# EAGLE board PocketBeagle (EAGLE 9.6.2)
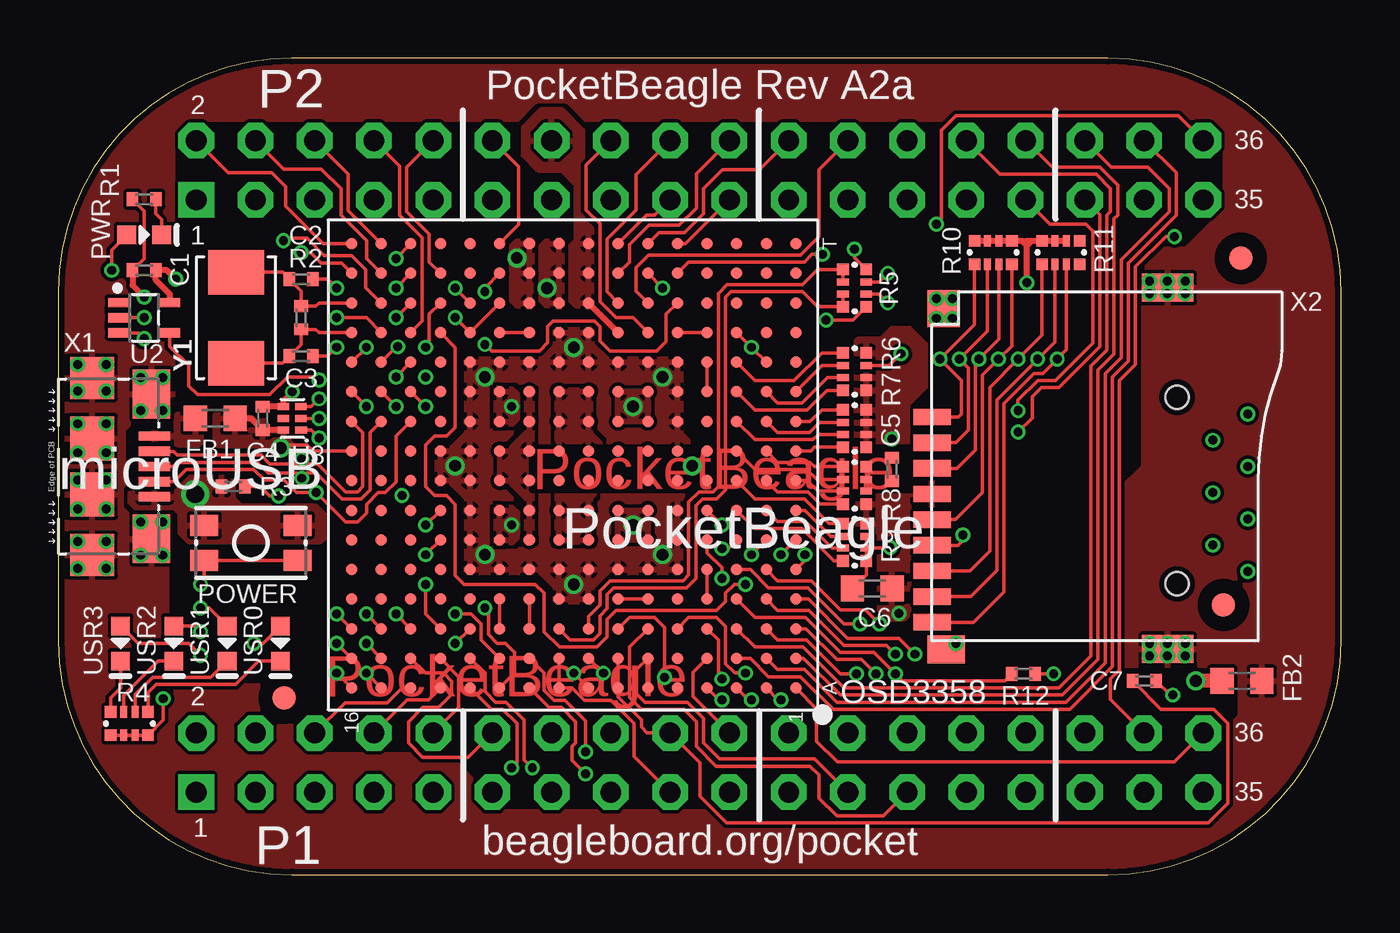
[diagram p0: board, top side]
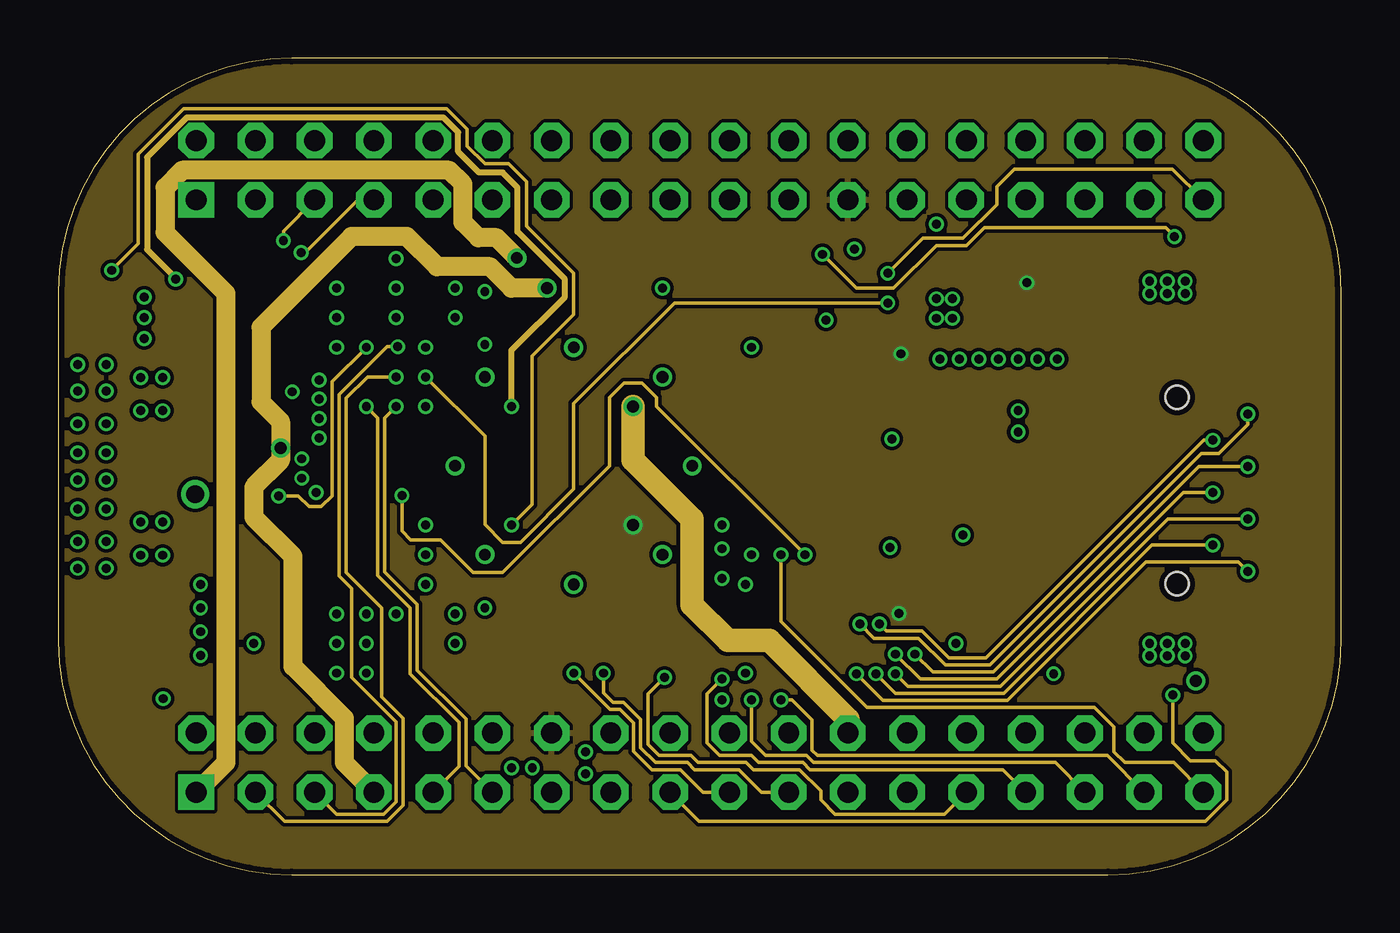
[diagram p1: board, inner layer VDD]
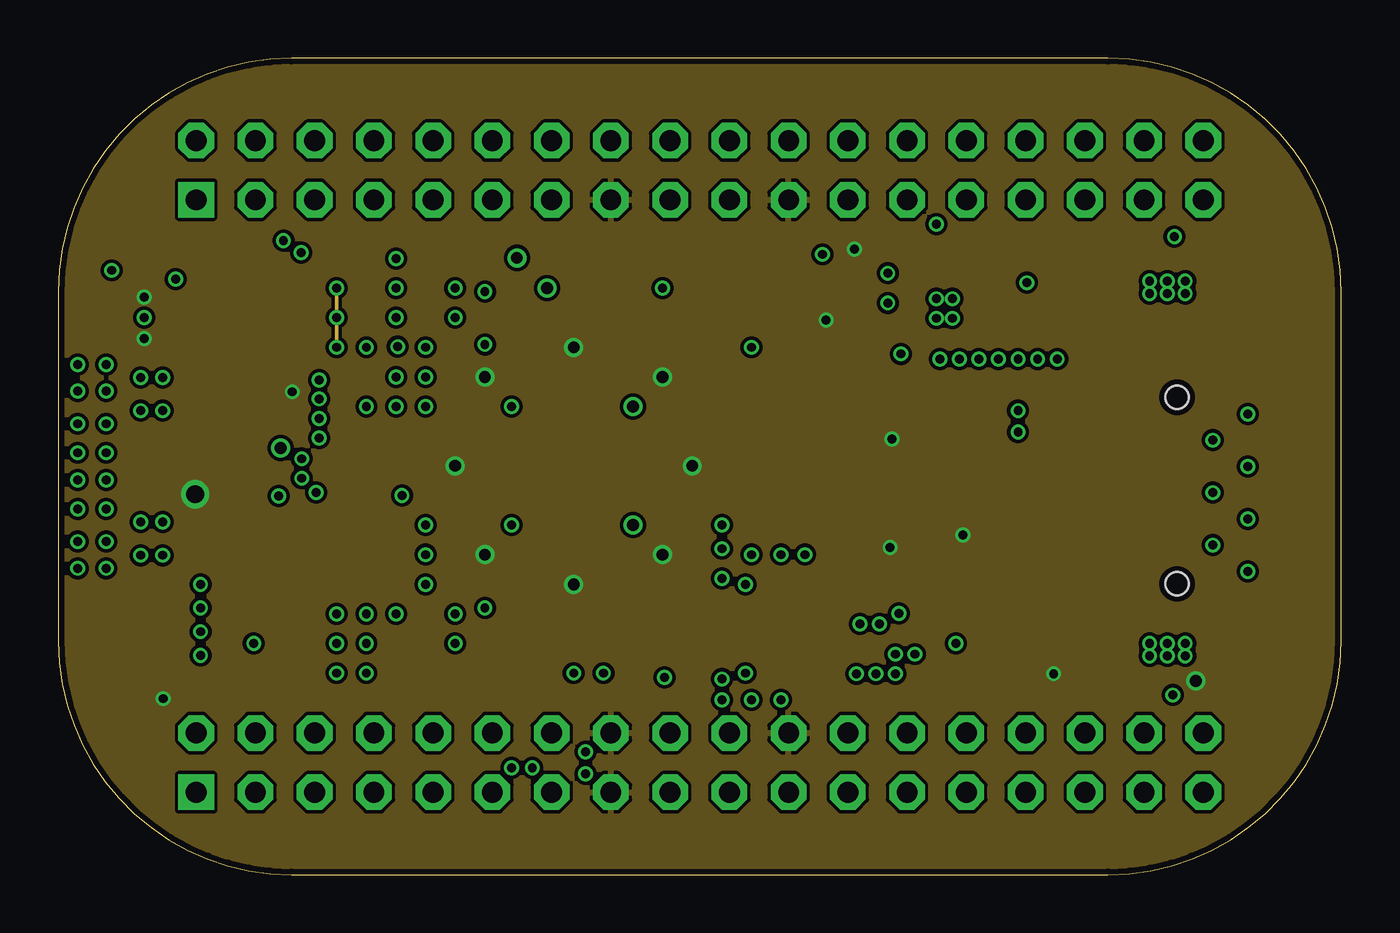
[diagram p2: board, inner layer DigitalGND]
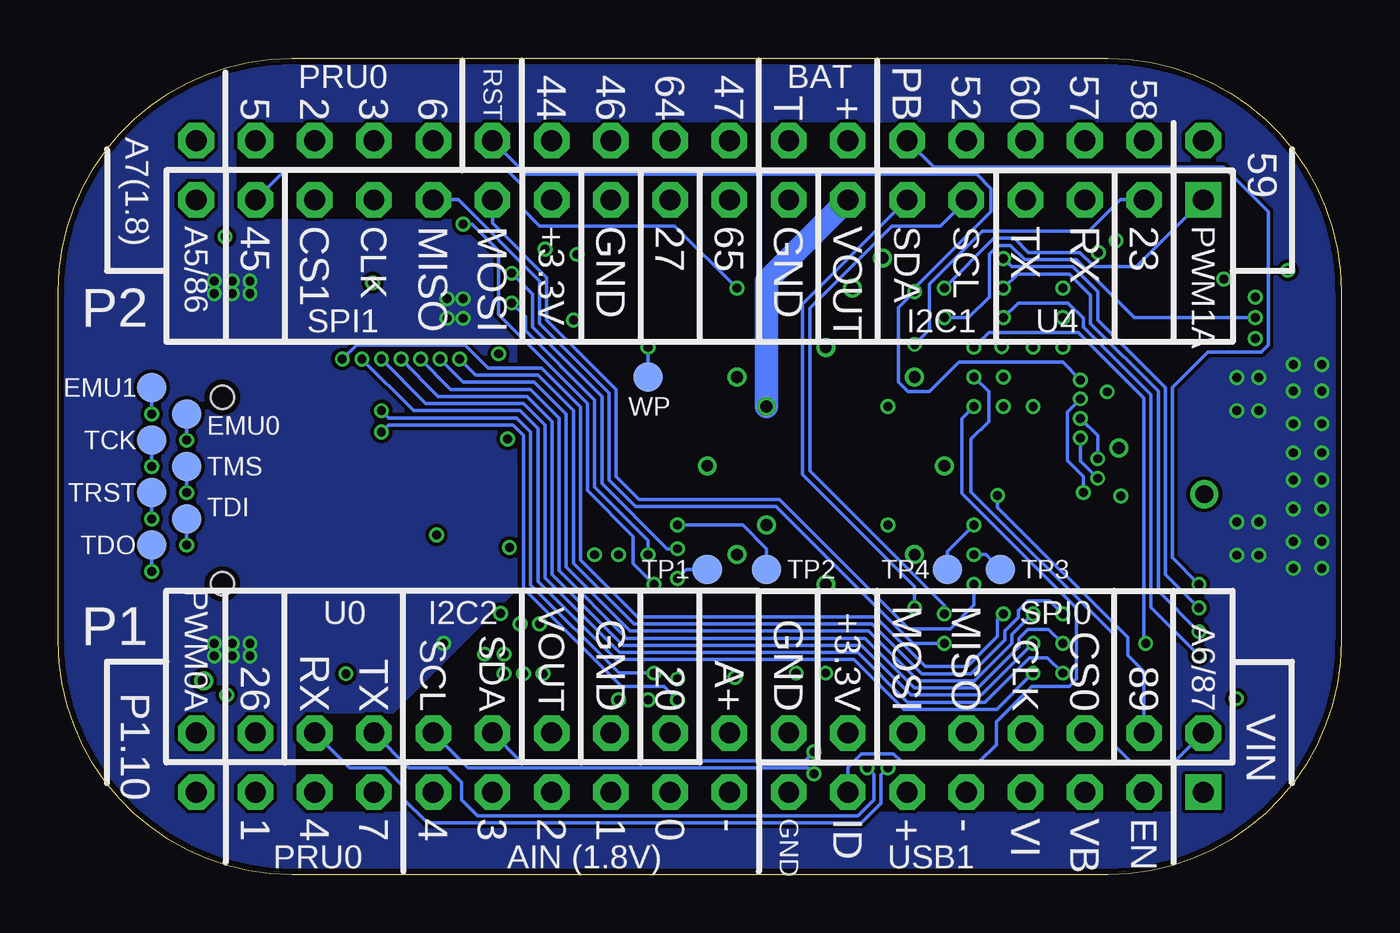
[diagram p3: board, bottom side, seen from below]

Size 55 x 35 mm. Coordinates in mm from the lower left corner, seen from the top.
Outline: 45,35 10,35 arc90 0,25 0,10 arc90 10,0 45,0 arc90 55,10 55,25 arc90 45,35
Copper layers (1+2+15+16): Top 0.035mm / dielectric 1.5mm / VDD 0.035mm / dielectric 0.15mm / DigitalGND 0.035mm / dielectric 0.2mm / Bottom 0.035mm
Design rules "default *": minimum track width 6mil, minimum drill 10mil, track to track 6mil, track to pad 6mil, pad to pad 6mil, via to via 6mil, smd to smd 6mil, copper to edge 10mil, drill to drill 8mil, minimum pad ring 10mil, minimum via ring 5mil, stop-mask expansion 4mil, vias tented up to drill 40mil, thermal gap 6mil
Milling: 8 lines

## Footprints (pad centres in the part's own frame; a part is rotated, then mirrored left to right if it is on the bottom)
0402 = smd 0.5 x 0.6: 1 -0.5,0; 2 0.5,0
0603 = smd 1 x 1.1: 1 -0.85,0; 2 0.85,0
B1,27 = smd 1.27 x 1.27: TP 0,0
FIDUCIAL_40MIL = smd 1.016 x 1.016: P$1 0,0
TH-2X18-(35MIL-DIA)-W/O-SILK = drill 0.889 pad 1.524 square: 1 -21.59,-1.27 | drill 0.889 pad 1.524 octagon: 2 -21.59,1.27; 3 -19.05,-1.27; 4 -19.05,1.27; 5 -16.51,-1.27; 6 -16.51,1.27; 7 -13.97,-1.27; 8 -13.97,1.27; 9 -11.43,-1.27; 10 -11.43,1.27; 11 -8.89,-1.27; 12 -8.89,1.27; 13 -6.35,-1.27; 14 -6.35,1.27; 15 -3.81,-1.27; 16 -3.81,1.27; 17 -1.27,-1.27; 18 -1.27,1.27; 19 1.27,-1.27; 20 1.27,1.27; 21 3.81,-1.27; 22 3.81,1.27; 23 6.35,-1.27; 24 6.35,1.27; 25 8.89,-1.27; 26 8.89,1.27; 27 11.43,-1.27; 28 11.43,1.27; 29 13.97,-1.27; 30 13.97,1.27; 31 16.51,-1.27; 32 16.51,1.27; 33 19.05,-1.27; 34 19.05,1.27; 35 21.59,-1.27; 36 21.59,1.27
MINI_PUSHBUTTON = smd 1.2 x 0.9: 1 -2,0.75; 2 2,0.75; 3 -2,-0.75; 4 2,-0.75
0603-LED = smd 0.8 x 0.8: A 0,0.75; K 0,-0.75
RN0804 = smd 0.498 x 0.5: 1 -0.801,-0.5; 4 0.801,-0.5; 5 0.801,0.5; 8 -0.801,0.5 | smd 0.3 x 0.5: 2 -0.25,-0.5; 3 0.25,-0.5; 6 0.25,0.5; 7 -0.25,0.5
OSD335X-BGA-256 = smd 0.5 x 0.5: A1 -9.525,-9.525; A2 -9.525,-8.255; A3 -9.525,-6.985; A4 -9.525,-5.715; A5 -9.525,-4.445; A6 -9.525,-3.175; A7 -9.525,-1.905; A8 -9.525,-0.635; A9 -9.525,0.635; A10 -9.525,1.905; A11 -9.525,3.175; A12 -9.525,4.445; A13 -9.525,5.715; A14 -9.525,6.985; A15 -9.525,8.255; A16 -9.525,9.525; B1 -8.255,-9.525; B2 -8.255,-8.255; B3 -8.255,-6.985; B4 -8.255,-5.715; B5 -8.255,-4.445; B6 -8.255,-3.175; B7 -8.255,-1.905; B8 -8.255,-0.635; B9 -8.255,0.635; B10 -8.255,1.905; B11 -8.255,3.175; B12 -8.255,4.445; B13 -8.255,5.715; B14 -8.255,6.985; B15 -8.255,8.255; B16 -8.255,9.525; C1 -6.985,-9.525; C2 -6.985,-8.255; C3 -6.985,-6.985; C4 -6.985,-5.715; C5 -6.985,-4.445; C6 -6.985,-3.175; C7 -6.985,-1.905; C8 -6.985,-0.635; C9 -6.985,0.635; C10 -6.985,1.905; C11 -6.985,3.175; C12 -6.985,4.445; C13 -6.985,5.715; C14 -6.985,6.985; C15 -6.985,8.255; C16 -6.985,9.525; D1 -5.715,-9.525; D2 -5.715,-8.255; D3 -5.715,-6.985; D4 -5.715,-5.715; D5 -5.715,-4.445; D6 -5.715,-3.175; D7 -5.715,-1.905; D8 -5.715,-0.635; D9 -5.715,0.635; D10 -5.715,1.905; D11 -5.715,3.175; D12 -5.715,4.445; D13 -5.715,5.715; D14 -5.715,6.985; D15 -5.715,8.255; D16 -5.715,9.525; E1 -4.445,-9.525; E2 -4.445,-8.255; E3 -4.445,-6.985; E4 -4.445,-5.715; E5 -4.445,-4.445; E6 -4.445,-3.175; E7 -4.445,-1.905; E8 -4.445,-0.635; E9 -4.445,0.635; E10 -4.445,1.905; E11 -4.445,3.175; E12 -4.445,4.445; E13 -4.445,5.715; E14 -4.445,6.985; E15 -4.445,8.255; E16 -4.445,9.525; F1 -3.175,-9.525; F2 -3.175,-8.255; F3 -3.175,-6.985; F4 -3.175,-5.715; F5 -3.175,-4.445; F6 -3.175,-3.175; F7 -3.175,-1.905; F8 -3.175,-0.635; F9 -3.175,0.635; F10 -3.175,1.905; F11 -3.175,3.175; F12 -3.175,4.445; F13 -3.175,5.715; F14 -3.175,6.985; F15 -3.175,8.255; F16 -3.175,9.525; G1 -1.905,-9.525; G2 -1.905,-8.255; G3 -1.905,-6.985; G4 -1.905,-5.715; G5 -1.905,-4.445; G6 -1.905,-3.175; G7 -1.905,-1.905; G8 -1.905,-0.635; G9 -1.905,0.635; G10 -1.905,1.905; G11 -1.905,3.175; G12 -1.905,4.445; G13 -1.905,5.715; G14 -1.905,6.985; G15 -1.905,8.255; G16 -1.905,9.525; H1 -0.635,-9.525; H2 -0.635,-8.255; H3 -0.635,-6.985; H4 -0.635,-5.715; H5 -0.635,-4.445; H6 -0.635,-3.175; H7 -0.635,-1.905; H8 -0.635,-0.635; H9 -0.635,0.635; H10 -0.635,1.905; H11 -0.635,3.175; H12 -0.635,4.445; H13 -0.635,5.715; H14 -0.635,6.985; H15 -0.635,8.255; H16 -0.635,9.525; J1 0.635,-9.525; J2 0.635,-8.255; J3 0.635,-6.985; J4 0.635,-5.715; J5 0.635,-4.445; J6 0.635,-3.175; J7 0.635,-1.905; J8 0.635,-0.635; J9 0.635,0.635; J10 0.635,1.905; J11 0.635,3.175; J12 0.635,4.445; J13 0.635,5.715; J14 0.635,6.985; J15 0.635,8.255; J16 0.635,9.525; K1 1.905,-9.525; K2 1.905,-8.255; K3 1.905,-6.985; K4 1.905,-5.715; K5 1.905,-4.445; K6 1.905,-3.175; K7 1.905,-1.905; K8 1.905,-0.635; K9 1.905,0.635; K10 1.905,1.905; K11 1.905,3.175; K12 1.905,4.445; K13 1.905,5.715; K14 1.905,6.985; K15 1.905,8.255; K16 1.905,9.525; L1 3.175,-9.525; L2 3.175,-8.255; L3 3.175,-6.985; L4 3.175,-5.715; L5 3.175,-4.445; L6 3.175,-3.175; L7 3.175,-1.905; L8 3.175,-0.635; L9 3.175,0.635; L10 3.175,1.905; L11 3.175,3.175; L12 3.175,4.445; L13 3.175,5.715; L14 3.175,6.985; L15 3.175,8.255; L16 3.175,9.525; M1 4.445,-9.525; M2 4.445,-8.255; M3 4.445,-6.985; M4 4.445,-5.715; M5 4.445,-4.445; M6 4.445,-3.175; M7 4.445,-1.905; M8 4.445,-0.635; M9 4.445,0.635; M10 4.445,1.905; M11 4.445,3.175; M12 4.445,4.445; M13 4.445,5.715; M14 4.445,6.985; M15 4.445,8.255; M16 4.445,9.525; N1 5.715,-9.525; N2 5.715,-8.255; N3 5.715,-6.985; N4 5.715,-5.715; N5 5.715,-4.445; N6 5.715,-3.175; N7 5.715,-1.905; N8 5.715,-0.635; N9 5.715,0.635; N10 5.715,1.905; N11 5.715,3.175; N12 5.715,4.445; N13 5.715,5.715; N14 5.715,6.985; N15 5.715,8.255; N16 5.715,9.525; P1 6.985,-9.525; P2 6.985,-8.255; P3 6.985,-6.985; P4 6.985,-5.715; P5 6.985,-4.445; P6 6.985,-3.175; P7 6.985,-1.905; P8 6.985,-0.635; P9 6.985,0.635; P10 6.985,1.905; P11 6.985,3.175; P12 6.985,4.445; P13 6.985,5.715; P14 6.985,6.985; P15 6.985,8.255; P16 6.985,9.525; R1 8.255,-9.525; R2 8.255,-8.255; R3 8.255,-6.985; R4 8.255,-5.715; R5 8.255,-4.445; R6 8.255,-3.175; R7 8.255,-1.905; R8 8.255,-0.635; R9 8.255,0.635; R10 8.255,1.905; R11 8.255,3.175; R12 8.255,4.445; R13 8.255,5.715; R14 8.255,6.985; R15 8.255,8.255; R16 8.255,9.525; T1 9.525,-9.525; T2 9.525,-8.255; T3 9.525,-6.985; T4 9.525,-5.715; T5 9.525,-4.445; T6 9.525,-3.175; T7 9.525,-1.905; T8 9.525,-0.635; T9 9.525,0.635; T10 9.525,1.905; T11 9.525,3.175; T12 9.525,4.445; T13 9.525,5.715; T14 9.525,6.985; T15 9.525,8.255; T16 9.525,9.525
SC70(TI-DCK) = smd 0.4 x 0.9: 1 0.65,1.1; 2 0,1.1; 3 -0.65,1.1; 4 -0.65,-1.1; 5 0.65,-1.1
SON-6(TI)-DRY = smd 0.3 x 0.52: 1 -0.5,-0.38 | smd 0.3 x 0.49: 2 0,-0.375; 3 0.5,-0.375; 4 0.5,0.375; 5 0,0.375; 6 -0.5,0.375
10118192-0001LF(MICRO-USB-B-AMPHENOL-FCI) = smd 1.8 x 1.9: CGND1 -3.8,0; CGND4 3.8,0 | smd 1.9 x 1.9: CGND2 -1.2,0; CGND3 1.2,0 | smd 2.1 x 1.6: CGND5 3.1,2.55; CGND6 -3.1,2.55 | smd 0.4 x 1.35: D+ 0,2.675; D- -0.65,2.675; GND 1.3,2.675; ID 0.65,2.675; VBUS -1.3,2.675
MICROSD = smd 1.6 x 0.7: 1 0,4.4; 2 0,3.3; 3 0,2.2; 4 0,1.1; 5 0,0; 6 0,-1.1; 7 0,-2.2; 8 0,-3.3; 9 0,-4.4 | smd 1.6 x 1.2: G1 0.6,-5.56 | smd 2.2 x 1.2: G2 10.1,-5.55; G3 10.1,9.95 | smd 1.4 x 1.6: G4 0.5,9.05 | hole 1: 10.5,-2.75; 10.5,5.25
CRYSTAL_5X3.2MM = smd 1.9 x 2.4: 1 -1.95,0; 2 1.95,0

## Placement (x,y rotation side)
C1  0.1uF, 6.3V  [0402]  3.68,25.91 180 top
C2  18pF, 50V  [0402]  10.41,25.53 180 top
C3  18pF, 50V  [0402]  10.41,22.23 180 top
C4  .1uF, 6.3V  [0402]  8.76,19.56 90 top
C5  0.1uF, 6.3V  [0402]  35.74,17.37 90 top
C6  10uF, 10V  [0603]  34.9,12.27 180 top
C7  0.1uF, 6.3V  [0402]  46.56,8.31 0 top
EMU0  PTR1B1,27  [B1,27]  49.5,19.75 270 bottom
EMU1  PTR1B1,27  [B1,27]  51,20.88 270 bottom
FB1  [0603]  6.73,19.56 0 top
FB2  [0603]  50.75,8.31 180 top
FUD1  FIDUCIAL  [FIDUCIAL_40MIL]  50.7,26.42 0 top
FUD2  FIDUCIAL  [FIDUCIAL_40MIL]  9.69,7.58 270 top
FUD3  FIDUCIAL  [FIDUCIAL_40MIL]  49.95,11.57 0 top
P1  [TH-2X18-(35MIL-DIA)-W/O-SILK]  27.5,4.8 0 top
P2  [TH-2X18-(35MIL-DIA)-W/O-SILK]  27.5,30.2 0 top
POWER  MINI_PUSHBUTTON  [MINI_PUSHBUTTON]  8.26,14.22 0 top
PWR  LTST-C191TBKT  [0603-LED]  3.68,27.43 90 top
R1  1k  [0402]  3.68,28.96 0 top
R2  1M, 1%  [0402]  10.41,23.88 90 top
R3  10k  [0402]  7.49,16.64 0 top
R4  1k  [RN0804]  3.05,6.48 180 top
R5  10k  [RN0804]  34.14,25.15 270 top
R6  100k  [RN0804]  34.14,21.56 270 top
R7  100k  [RN0804]  34.14,19.13 270 top
R8  100k  [RN0804]  34.14,16.69 270 top
R9  100k  [RN0804]  34.14,14.25 90 top
R10  10k  [RN0804]  40.08,26.67 0 top
R11  10k  [RN0804]  42.98,26.67 180 top
R12  10k  [0402]  41.38,8.61 180 top
TCK  PTR1B1,27  [B1,27]  51,18.62 270 bottom
TDI  PTR1B1,27  [B1,27]  49.5,15.25 270 bottom
TDO  PTR1B1,27  [B1,27]  51,14.12 270 bottom
TMS  PTR1B1,27  [B1,27]  49.5,17.5 270 bottom
TP1  PTR1B1,27  [B1,27]  27.18,13.08 0 bottom
TP2  PTR1B1,27  [B1,27]  24.64,13.08 0 bottom
TP3  PTR1B1,27  [B1,27]  14.61,13.08 0 bottom
TP4  PTR1B1,27  [B1,27]  16.89,13.08 0 bottom
TRST  PTR1B1,27  [B1,27]  51,16.38 270 bottom
U1  OSD3358-512M-BSM  [OSD335X-BGA-256]  22.1,17.53 90 top
U2  SN74LVC1G07DCK  [SC70(TI-DCK)]  3.68,23.88 90 top
U3  TPD4S012DRY  [SON-6(TI)-DRY]  10.03,19.56 90 top
USR0  LTST-C191TBKT  [0603-LED]  9.53,9.91 0 top
USR1  LTST-C191TBKT  [0603-LED]  7.24,9.91 0 top
USR2  LTST-C191TBKT  [0603-LED]  4.95,9.91 0 top
USR3  LTST-C191TBKT  [0603-LED]  2.67,9.91 0 top
WP  PTR1B1,27  [B1,27]  29.72,21.34 0 bottom
X1  10118192-0001LF  [10118192-0001LF(MICRO-USB-B-AMPHENOL-FCI)]  1.45,17.5 270 top
X2  MICROSD  [MICROSD]  37.46,15.22 0 top
Y1  24 MHz  [CRYSTAL_5X3.2MM]  7.62,23.88 90 top

## Library data of the parts
C1-C7 FB1 FB2 PWR R1-R12 USR0 USR1-USR3 = GHI-BasicComponents
EMU0 EMU1 TCK TDI TDO TMS TP1-TP4 TRST WP = testpad
FUD1-FUD3 = GHI
P1 P2 = GHI-Headers
POWER Y1 = GHI2
U1 = GHI-SoMs-Processors
U2 U3 = GHI-IC
X1 = GHI-Connectors
X2 = microSD

## Nets
3.3V: C5.1 C6.1 P1.14 P2.23 R6.7 R8.5 R9.4 R10.5 R10.6 R10.7 R10.8 R11.2 R11.3 R11.4 U1.F6 U1.F7 U1.G6 U1.G7 X2.4
(U1.A15)MMC0.D1: R11.6 U1.A15 X2.8
(U1.A16)MMC0.D0: R11.5 U1.A16 X2.7
(U1.B15)MMC0.CLK: R10.4 U1.B15 X2.5
(U1.B16)MMC0.CMD: R10.3 U1.B16 X2.3
(U1.C8)AIN5~1.8V: R5.1 R5.2 U1.C8
(U1.C9)AIN6~1.8V: R5.3 R5.4 U1.C9
(U1.C14)MMC0.CD: R11.7 U1.C14 X2.9
(U1.C15)MMC0.D3: R10.2 U1.C15 X2.2
(U1.C16)MMC0.D2: R10.1 U1.C16 X2.1
(U1.G1)LCD.D2.B5: R9.6 U1.G1
(U1.G2)LCD.D1.B4: R9.7 U1.G2
(U1.G3)LCD.D0.B3: R9.8 U1.G3
(U1.H1)LCD.D5.G2: R8.3 U1.H1
(U1.H2)LCD.D4.B7: R8.4 U1.H2
(U1.H3)LCD.D3.B6: R9.5 U1.H3
(U1.J1)LCD.D8.G5: R7.4 U1.J1
(U1.J2)LCD.D7.G4: R8.1 U1.J2
(U1.J3)LCD.D6.G3: R8.2 U1.J3
(U1.K1)LCD.D11.R3: R7.1 U1.K1
(U1.K2)LCD.D10.G7: R7.2 U1.K2
(U1.K3)LCD.D9.G6: R7.3 U1.K3
(U1.K14)USBC.ID: U1.K14 U3.3 X1.ID
(U1.K15)USBC.D+: U1.K15 U3.1 X1.D+
(U1.K16)USBC.D-: U1.K16 U3.2 X1.D-
(U1.L1)LCD.D14.R6: R6.2 U1.L1
(U1.L2)LCD.D13.R5: R6.3 U1.L2
(U1.L3)LCD.D12.R4: R6.4 U1.L3
(U1.M2)EEPROM.WP: U1.M2 U1.N3 WP.TP
(U1.M3)LCD.D15.R7: R6.1 U1.M3
(U1.P13)USR0: U1.P13 USR0.A
(U1.P14)USR3: U1.P14 USR3.A
(U1.R14)USR2: U1.R14 USR2.A
(U1.T14)USR1: U1.T14 USR1.A
AIN0(1.8V): P1.19 U1.A8
AIN1(1.8V): P1.21 U1.B8
AIN2(1.8V): P1.23 U1.B6
AIN3(1.8V): P1.25 U1.C6
AIN4(1.8V): P1.27 U1.C7
AIN5(3.3V): P2.35 R5.7 U1.F3
AIN6/GPIO87: P1.2 R5.6 U1.F2
AIN7(1.8V): P2.36 U1.N13
AIN.VREF+: C7.1 P1.18 U1.A7 U1.B7
AIN.VREF-: C7.2 P1.17 U1.A9 U1.B9
BAT.TEMP: P2.16 U1.N6
BAT.VIN: P2.14 U1.N7 U1.P8 U1.R8 U1.T8
CGND: FB2.1 X1.CGND1 X1.CGND2 X1.CGND3 X1.CGND4 X1.CGND5 X1.CGND6 X2.G1 X2.G2 X2.G3 X2.G4
GND [power]: C1.2 C4.2 C5.2 C6.2 FB2.2 P1.15 P1.16 P1.22 P2.15 P2.21 POWER.1 POWER.2 R1.1 R3.1 R4.5 R4.6 R4.7 R4.8 R5.5 R5.8 R6.5 R6.6 R6.8 R7.5 R7.6 R7.7 R7.8 R8.6 R8.7 R8.8 R9.1 R9.2 R9.3 R12.1 U1.D8 U1.D9 U1.E5 U1.E6 U1.E7 U1.E8 U1.E9 U1.E10 U1.E11 U1.E12 U1.F5 U1.F12 U1.G5 U1.G12 U1.H4 U1.H5 U1.H12 U1.H13 U1.J4 U1.J5 U1.J12 U1.J13 U1.K5 U1.K12 U1.L5 U1.L12 U1.M5 U1.M6 U1.M7 U1.M8 U1.M9 U1.M10 U1.M11 U1.M12 U1.N8 U1.N9 U2.3 U3.4 X1.GND X2.6
GPIO20: P1.20 U1.B4
GPIO23: P2.3 U1.P5
GPIO26: P1.34 U1.R5
GPIO27: P2.19 U1.T5
GPIO44: P2.24 U1.P6
GPIO45: P2.33 U1.R6
GPIO46: P2.22 U1.T6
GPIO47: P2.18 U1.P7
GPIO52: P2.10 U1.R13
GPIO57: P2.6 U1.T15
GPIO58: P2.4 U1.R15
GPIO59: P2.2 U1.T16
GPIO60: P2.8 U1.N14
GPIO64: P2.20 U1.R7
GPIO65: P2.17 U1.T7
GPIO89: P1.4 U1.E1
I2C1.SCL: P2.9 U1.B11
I2C1.SDA: P2.11 U1.A11
I2C2.SCL: P1.28 U1.A10
I2C2.SDA: P1.26 U1.B10
JTAG_EMU0: EMU0.TP U1.E2
JTAG_EMU1: EMU1.TP U1.E3
JTAG_TCK: TCK.TP U1.D1
JTAG_TDI: TDI.TP U1.C1
JTAG_TDO: TDO.TP U1.C2
JTAG_TMS: TMS.TP U1.D2
JTAG_TRST#: R12.2 TRST.TP U1.D3
N$1: R4.3 USR2.K
N$2: R4.4 USR3.K
N$4: PWR.K R1.2
N$5: R4.2 USR1.K
N$6: R4.1 USR0.K
N$7: TP1.TP U1.F4
N$9: TP2.TP U1.G4
N$10: TP3.TP U1.F13
N$11: TP4.TP U1.G13
N$12: U1.D6 U1.D7
N$22: R3.2 U1.M16
N$24: U1.N4 U1.N5
N$25: U1.L4 U1.M4
N$26: U1.D4 U1.E4
N$27: U1.N10 U1.N11
N$31: U1.C11 U1.D11
N$32: U1.C10 U1.D10
OSC.GND: C2.1 C3.1 U1.N15
OSC.IN: C2.2 R2.2 U1.P16 Y1.2
OSC.OUT: C3.2 R2.1 U1.N16 Y1.1
PMIC_PGOOD: U1.N12 U1.P11 U2.2
PRU0.1: P1.33 U1.A2
PRU0.2: P2.32 U1.B2
PRU0.3: P2.30 U1.B1
PRU0.4: P1.31 U1.A3
PRU0.5: P2.34 U1.B3
PRU0.6: P2.28 U1.C3
PRU0.7: P1.29 U1.C4
PRU1.10: P1.35 U1.F1
PWM0A: P1.36 U1.A1
PWM1A: P2.1 U1.P12
PWR.BTN: P2.12 POWER.3 POWER.4 U1.T11
RESET#: P2.26 U1.R11 U2.4
SPI0.CLK: P1.8 U1.A13
SPI0.CS: P1.6 U1.A14
SPI0.MISO: P1.10 U1.B13
SPI0.MOSI: P1.12 U1.B14
SPI1.CLK: P2.29 U1.C5
SPI1.CS: P2.31 U1.A4
SPI1.MISO: P2.27 U1.C12
SPI1.MOSI: P2.25 U1.C13
UART0.RX: P1.32 U1.A12
UART0.TX: P1.30 U1.B12
UART4.RX: P2.5 U1.P15
UART4.TX: P2.7 U1.R16
USB1.D+: P1.11 U1.L15
USB1.D-: P1.9 U1.L16
USB1.DRVVBUS: P1.3 U1.M14
USB1.ID: P1.13 U1.L14
USB1.VBUS: P1.5 U1.M15
VBUS.RAW: FB1.1 X1.VBUS
VDD_1V8: U1.F10 U1.G10 U1.H10 U1.H11 U1.J10 U1.J11 U1.K10 U1.L10
VDD_3V3A: U1.F8 U1.F9 U1.G8 U1.G9 U1.H7 U1.H8 U1.H9 U1.J7 U1.J8 U1.J9 U1.K8 U1.K9 U1.L8 U1.L9
VDD_3V3AUX: PWR.A U1.F11 U1.G11
VDD_RTC: C1.1 U1.K11 U1.L11 U2.5
VIN: P1.1 U1.P10 U1.R10 U1.T10
VIN.USB: C4.1 FB1.2 P1.7 U1.J16 U1.P9 U1.R9 U1.T9 U3.6
VOUT: P1.24 P2.13 U1.K6 U1.K7 U1.L6 U1.L7

## Tracks (layer width: path | path; a pad name or v marks a point on that pad's centre or on a via)
3.3V  (via drill 0.38, 0.51)
  Top 0.152: v36.12,22.33 35.61,21.82 R6.7
  Top 0.254: R11.2 R11.3 R11.4 41.72,27.17 | R10.8 R10.7 R10.6 R10.5 41.33,27.17 | v41.53,25.38 41.53,26.98 | 41.53,26.98 41.33,27.17 | 41.72,27.17 41.53,26.98 | 41.33,27.17 41.56,27.17 41.6,27.13 | 41.72,27.17 41.5,27.17 41.45,27.13
  other vias: 24.64,14.99 36.04,11.2
  pour VDD: -0.75,35.75 55.75,35.75 55.75,-0.75 -0.75,-0.75
  pour Top: 24,14.35 24,15.62 25.27,15.62 25.27,14.35
  pour Top: 35.59,10.97 36.27,10.97 36.5,11.2 36.5,15.62 36.65,15.77 37.64,15.77 37.64,16.84 35.36,16.84 34.98,16.46 34.44,16.46 34.29,16.31 34.29,14.94 34.37,14.86 34.98,14.86 35.2,14.63 35.2,11.35
(U1.A15)MMC0.D1  (via drill 0.38)
  Top 0.152: U1.A15 v13.21,8.64 | X2.8 39.12,11.92 40.23,13.03 40.23,20.34 v41.99,22.1 42.73,22.84 R11.6
  Bottom 0.152: v13.21,8.64 14.76,7.09 18.75,7.09 20.88,9.22 31.09,9.22 34.44,12.57 34.44,19.13 35.2,19.89 39.78,19.89 v41.99,22.1
(U1.A16)MMC0.D0  (via drill 0.38)
  Top 0.152: U1.A16 v11.94,8.64 | X2.7 39.08,13.02 39.93,13.87 39.93,20.88 v41.15,22.1 42.18,23.13 R11.5
  Bottom 0.152: v11.94,8.64 12.6,9.3 13.36,9.3 15.27,7.39 18.59,7.39 20.73,9.53 30.94,9.53 34.14,12.72 34.14,19.28 35.05,20.19 39.24,20.19 v41.15,22.1
(U1.B15)MMC0.CLK  (via drill 0.38)
  Top 0.152: U1.B15 v13.21,9.91 | X2.5 38.46,15.22 39.62,16.38 39.62,21.41 v40.31,22.1 40.88,22.67 R10.4
  Bottom 0.152: v13.21,9.91 15.42,7.7 18.44,7.7 20.57,9.83 30.79,9.83 33.83,12.88 33.83,19.43 34.9,20.5 38.71,20.5 v40.31,22.1
(U1.B16)MMC0.CMD  (via drill 0.38)
  Top 0.152: U1.B16 v11.94,9.91 | X2.3 38.52,17.42 39.32,18.21 39.32,21.95 v39.47,22.1 40.33,22.96 R10.3
  Bottom 0.152: v11.94,9.91 12.55,10.52 13.44,10.52 13.82,10.13 13.82,9.75 15.57,8 18.29,8 20.42,10.13 30.63,10.13 33.53,13.03 33.53,19.58 34.75,20.8 38.18,20.8 v39.47,22.1
(U1.C8)AIN5~1.8V
  Top 0.152: U1.C8 22.73,11.07 23.22,11.56 23.22,12.17 23.65,12.6 26.77,12.6 27.03,12.85 27.03,15.98 27.46,16.41 28.07,16.41 28.3,16.64 28.3,24.92 28.68,25.3 31.9,25.3 32.55,25.95 R5.1 R5.2
(U1.C9)AIN6~1.8V
  Top 0.152: U1.C9 21.95,10.06 22.94,10.06 23.22,10.34 23.22,11.1 23.52,11.4 23.52,12.01 23.8,12.29 26.92,12.29 27.33,12.7 27.33,15.82 27.61,16.1 28.22,16.1 28.6,16.48 28.6,24.77 28.83,24.99 31.9,24.99 32.55,24.34 R5.4 R5.3
(U1.C14)MMC0.CD  (via drill 0.38)
  Top 0.152: U1.C14 v14.48,11.18 | X2.9 39.24,10.82 40.54,12.12 40.54,20.19 41.83,21.49 42.22,21.49 v42.82,22.1 43.23,22.5 R11.7
  Bottom 0.152: v14.48,11.18 14.73,10.92 14.73,10.21 16.03,8.91 17.83,8.91 19.96,11.05 30.18,11.05 32.61,13.49 32.61,20.04 34.29,21.72 36.58,21.72 37.57,22.71 42.22,22.71 v42.82,22.1
(U1.C15)MMC0.D3  (via drill 0.38)
  Top 0.152: U1.C15 v13.21,11.18 | X2.2 38.48,18.52 39.01,19.05 39.01,21.72 v38.63,22.1 39.83,23.3 R10.2
  Bottom 0.152: v13.21,11.18 13.23,11.18 14.12,10.29 14.12,9.91 15.72,8.31 18.14,8.31 20.27,10.44 30.48,10.44 33.22,13.18 33.22,19.74 34.59,21.11 37.64,21.11 v38.63,22.1
(U1.C16)MMC0.D2  (via drill 0.38)
  Top 0.152: U1.C16 v11.94,11.18 | X2.1 38.59,19.62 38.71,19.74 38.71,21.18 v37.8,22.1 39.28,23.58 R10.1
  Bottom 0.152: v11.94,11.18 12.5,11.73 13.44,11.73 13.84,11.33 13.84,11.02 14.43,10.44 14.43,10.06 15.88,8.61 17.98,8.61 20.12,10.74 30.33,10.74 32.92,13.34 32.92,19.89 34.44,21.41 37.11,21.41 v37.8,22.1
(U1.G1)LCD.D2.B5
  Top 0.152: R9.6 33.13,14.5 32,15.62 U1.G1
(U1.G2)LCD.D1.B4
  Top 0.152: U1.G2 30.84,15.14 32.03,15.14 33.17,14 R9.7
(U1.G3)LCD.D0.B3
  Top 0.152: U1.G3 29.87,14.83 31.88,14.83 33.26,13.45 R9.8
(U1.H1)LCD.D5.G2
  Top 0.152: R8.3 32.56,16.44 32.11,16.89 U1.H1
(U1.H2)LCD.D4.B7
  Top 0.152: U1.H2 30.84,16.41 32.13,16.41 32.65,15.89 R8.4
(U1.H3)LCD.D3.B6
  Top 0.152: U1.H3 29.87,16.1 31.98,16.1 33.03,15.05 R9.5
(U1.J1)LCD.D8.G5
  Top 0.152: U1.J1 32.26,18.16 32.42,18.32 R7.4
(U1.J2)LCD.D7.G4
  Top 0.152: U1.J2 30.84,17.68 32.23,17.68 32.42,17.49 R8.1
(U1.J3)LCD.D6.G3
  Top 0.152: U1.J3 29.87,17.37 32.08,17.37 32.52,16.94 R8.2
(U1.K1)LCD.D11.R3
  Top 0.152: R7.1 32.73,19.93 32.23,19.43 U1.K1
(U1.K2)LCD.D10.G7
  Top 0.152: U1.K2 30.84,18.95 32.21,18.95 32.63,19.38 R7.2
(U1.K3)LCD.D9.G6
  Top 0.152: U1.K3 29.87,18.64 32.36,18.64 32.59,18.88 R7.3
(U1.K14)USBC.ID  (via drill 0.38)
  Top 0.152: X1.ID 4.96,16.85 5.49,17.37 8.38,17.37 8.84,16.92 9.68,16.92 10.21,16.38 v11.05,16.38 12.32,15.11 12.83,15.11 13.21,15.49 13.21,15.88 13.72,16.38 14.02,16.38 14.48,16.84 14.48,18.8 U1.K14 | U3.3 10.84,20.06 v11.18,20.4
  Bottom 0.152: v11.18,20.4 11.73,19.84 11.73,17.75 11.05,17.07 v11.05,16.38
(U1.K15)USBC.D+  (via drill 0.38)
  Top 0.152: U1.K15 13.36,18.95 13.36,16.48 12.98,16.1 12.17,16.1 11.05,17.22 10.67,17.22 v10.44,16.99 10.21,17.22 8.99,17.22 8.53,17.68 5.11,17.68 4.93,17.5 X1.D+ | U3.1 10.84,19.06 v11.18,18.72
  Bottom 0.152: v11.18,18.72 11.18,17.73 v10.44,16.99
(U1.K16)USBC.D-  (via drill 0.38)
  Top 0.152: U1.K16 13.06,18.95 13.06,16.64 12.83,16.41 12.32,16.41 11.12,17.6 10.67,17.6 v10.44,17.83 10.21,17.6 9.07,17.6 8.69,17.98 5.11,17.98 4.94,18.15 X1.D- | U3.2 v11.18,19.56
  Bottom 0.152: v11.18,19.56 10.44,18.82 v10.44,17.83
(U1.L1)LCD.D14.R6
  Top 0.152: U1.L1 32.74,21.82 R6.2
(U1.L2)LCD.D13.R5
  Top 0.152: U1.L2 30.84,20.22 31.88,20.22 32.97,21.32 R6.3
(U1.L3)LCD.D12.R4
  Top 0.152: U1.L3 29.87,19.91 32.11,19.91 32.96,20.76 R6.4
(U1.M2)EEPROM.WP  (via drill 0.38)
  Top 0.152: U1.N3 v29.72,22.61 U1.M2
  Bottom 0.152: v29.72,22.61 WP.TP
(U1.M3)LCD.D15.R7
  Top 0.152: U1.M3 29.87,21.18 31.55,21.18 32.73,22.37 R6.1
(U1.P13)USR0  (via drill 0.38)
  Top 0.152: v8.38,9.91 8.78,9.91 USR0.A | U1.P13 15.9,24.03 15.9,22.76 v15.75,22.61
  Bottom 0.152: v15.75,22.61 15.11,23.24 11.28,23.24 8.46,20.42 8.46,9.98 v8.38,9.91
(U1.P14)USR3  (via drill 0.38)
  Top 0.152: U1.P14 v14.48,23.88 | USR3.A 3.42,9.91 5.59,9.91 v6.1,9.4
  Bottom 0.152: v14.48,23.88 13.84,24.51 11.71,24.51 11.05,23.85 11.05,23.47 8.15,20.57 8.15,11.46 v6.1,9.4
(U1.R14)USR2  (via drill 0.38)
  Top 0.152: v14.48,25.15 U1.R14 | USR2.A 5.85,10.66 v6.1,10.41
  Bottom 0.152: v14.48,25.15 13.87,25.76 11.66,25.76 10.74,24.84 10.74,23.62 7.85,20.73 7.85,12.17 v6.1,10.41
(U1.T14)USR1  (via drill 0.38)
  Top 0.152: v14.48,26.42 U1.T14 | USR1.A 6.46,11.43 v6.1,11.43
  Bottom 0.152: v14.48,26.42 14.12,26.06 11.51,26.06 10.44,24.99 10.44,23.77 7.54,20.88 7.54,12.88 v6.1,11.43
AIN0(1.8V)  (via drill 0.38)
  Top 0.152: U1.A8 v22.1,8.64
  VDD 0.152: v22.1,8.64 23.65,7.09 24.08,7.09 24.66,6.5 24.66,5.28 25.45,4.5 26.67,4.5 27.64,3.53 P1.19
AIN1(1.8V)  (via drill 0.38)
  Top 0.152: U1.B8 v23.37,8.64
  VDD 0.152: v23.37,8.64 23.37,7.8 23.77,7.39 24.23,7.39 24.97,6.66 24.97,5.44 25.6,4.8 26.98,4.8 27.28,4.5 29.18,4.5 30.15,3.53 P1.21
AIN2(1.8V)
  Top 0.152: U1.B6 24.79,8.79 24.79,7.75 25.15,7.39 26.98,7.39 27.66,6.71 27.66,5.64 28.35,4.95 32.43,4.95 P1.23
AIN3(1.8V)
  Top 0.152: P1.25 35.38,2.52 33.38,2.52 32.61,3.28 32.61,4.27 32.23,4.65 28.19,4.65 27.36,5.49 27.36,6.55 26.82,7.09 24.99,7.09 24.49,7.59 24.49,9.75 U1.C6
AIN4(1.8V)  (via drill 0.38)
  Top 0.152: U1.C7 24.49,11.02 25.55,11.02 25.98,10.59 v25.98,8.46
  VDD 0.152: v25.98,8.46 25.27,7.75 25.27,5.59 25.76,5.11 27.13,5.11 27.43,4.8 29.49,4.8 29.79,4.5 31.77,4.5 32.69,3.58 32.69,3.2 33.3,2.59 37.99,2.59 P1.27
AIN5(3.3V)  (via drill 0.38)
  Top 0.152: U1.F3 28.7,13.97 v28.45,13.97 | R5.7 35.17,25.4 v35.56,25.78
  VDD 0.152: v35.56,25.78 37.06,27.28 38.79,27.28 40.23,28.73 40.23,29.49 41,30.25 47.77,30.25 P2.35
  Bottom 0.152: v28.45,13.97 28.91,13.97 31.7,16.76 31.7,20.5 34.67,23.47 34.67,24.89 v35.56,25.78
AIN6/GPIO87  (via drill 0.38)
  Top 0.152: U1.F2 v29.72,13.72 | R5.6 35.17,24.9 v35.56,24.51
  VDD 0.152: v15.75,21.34 18.29,18.8 18.29,15.01 19.05,14.25 19.81,14.25 22.1,16.54 22.1,20.19 26.42,24.51 v35.56,24.51
  Bottom 0.152: v29.72,13.72 29.72,14.33 32,16.61 32,20.34 34.98,23.32 34.98,23.93 v35.56,24.51 | P1.2 7.18,4.8 8.99,4.8 9.75,5.56 9.75,10.29 15.88,16.41 15.88,18.67 15.11,19.43 15.11,20.7 v15.75,21.34
AIN7(1.8V)  (via drill 0.38)
  Top 0.152: U1.N13 17.02,22.61 17.02,19.18 16.64,18.8 16.13,18.8 15.75,18.41 15.75,16.64 16.13,16.26 16.64,16.26 17.02,15.88 17.02,12.83 17.4,12.45 20.45,12.45 20.83,12.06 20.83,10.41 21.49,9.75 23.09,9.75 23.52,10.19 23.52,10.95 23.9,11.33 28.22,11.33 28.6,11.71 28.6,12.06 28.98,12.45 v29.46,12.45 | v37.64,27.89 37.87,28.12 37.87,31.93 38.48,32.54 48.02,32.54 P2.36
  Bottom 0.152: v29.46,12.45 30.35,13.34 30.35,14.5 32.31,16.46 32.31,20.19 36.12,24 36.12,26.75 37.26,27.89 v37.64,27.89
AIN.VREF+
  Top 0.152: U1.B7 U1.A7 24,7.62 24.99,6.63 24.99,6.33 25.25,6.07 P1.18 27.51,4.79 27.51,3.35 28.65,2.21 49.3,2.21 50.14,3.05 50.14,6.48 49.53,7.09 47.28,7.09 C7.1
AIN.VREF-  (via drill 0.38)
  Top 0.152: U1.B9 U1.A9 22.02,8 22.55,7.47 23.7,7.47 24.69,6.48 24.69,5.07 P1.17 | C7.2 47.67,7.7 v47.78,7.7
  VDD 0.152: P1.17 27.47,2.29 49.17,2.29 50.09,3.2 50.09,4.39 49.61,4.88 48.54,4.88 47.78,5.64 v47.78,7.7
BAT.TEMP
  Top 0.152: P2.16 22.63,30.41 22.63,28.5 23.22,27.91 23.22,24.56 23.9,23.88 24.64,23.88 U1.N6
BAT.VIN
  Top 0.254: U1.N7 U1.P8
  pour Top (rank 2): 22.86,24.38 22.86,27.69 22.48,28.07 22.48,31.88 21.59,32.77 20.7,32.77 19.94,32 19.94,30.86 20.57,30.23 21.59,30.23 22.23,29.59 22.23,27.18 21.97,26.92 21.97,24.64 22.23,24.38
CGND  (via drill 0.38)
  Top 0.152: v3.53,21.31 4,20.84 X1.CGND6 | v4.47,21.31 4,20.84 X1.CGND6 | v4.47,19.89 4,20.36 X1.CGND6 | v3.53,19.89 4,20.36 X1.CGND6 | v2.06,13.13 1.49,13.7 X1.CGND4 | X2.G1 38.31,9.91 v38.48,9.91 | X2.G4 37.96,24.17 v37.64,23.85
  other vias: 4.47,13.69 3.53,13.69 3.53,15.11 4.47,15.11 2.06,14.27 0.84,14.27 0.84,13.13 2.06,15.67 0.84,15.67 0.84,16.92 2.06,16.92 0.84,18.08 2.06,18.08 2.06,19.33 0.84,19.33 0.84,20.73 2.06,20.73 2.06,21.87 0.84,21.87 37.64,24.69 38.33,24.69 38.33,23.85 46.79,25.45 46.79,24.92 48.31,25.45 48.31,24.92 47.55,24.92 47.55,25.45 48.31,9.37 48.31,9.91 46.79,9.91 46.79,9.37 47.55,9.91 47.55,9.37
  pour Top (rank 3): -1,17.5 -1,36 56,36 56,17.5 46.56,17.5 46.56,25.91 47.47,26.82 48.39,26.82 50.06,28.5 50.06,31.85 49.53,32.38 5.49,32.38 4.88,31.78 4.88,20.27 3.96,20.27 2.75,19.06 2.75,17.5
  pour Top (rank 3): -1,17.5 -1,-1 56,-1 56,17.5 46.53,17.5 45.49,16.46 45.49,8.99 50.67,8.99 50.67,6.78 49.68,5.79 49.68,2.67 18.29,2.67 17.83,3.12 17.83,3.96 16.69,5.11 10.67,5.11 10.13,5.64 10.13,6.55 8.61,8.08 5.33,8.08 4.65,8.76 4.65,15.32 3.12,15.32 2.75,15.69 2.75,17.5
  pour Bottom: -0.25,17.5 -0.25,35.25 55.25,35.25 55.25,17.5 35.43,17.5 35.43,25.37 38.02,27.97 39.78,27.97 46.86,27.97 47.47,28.57 47.47,31.85 46.94,32.38 7.01,32.38 7.01,17.5
  pour Bottom: -0.25,17.5 -0.25,-0.25 55.25,-0.25 55.25,17.5 35.43,17.5 35.43,12.27 40.69,7.01 44.35,7.01 44.96,6.4 44.96,3.2 44.35,2.59 7.01,2.59 7.01,17.5
GND  (via drill 0.38, 0.51, 0.76)
  Top 0.152: R9.2 R9.1 34.64,12.86 C6.2 | R9.2 R9.3 | R9.2 35.64,14 v35.66,14.02 | R12.1 v42.67,8.61 | X2.6 38.58,14.12 38.79,14.33 v38.79,14.55 | R5.5 34.07,23.77 v32.92,23.77 | R5.8 34.14,26.45 v34.14,26.82 | R4.5 R4.6 R4.7 R4.8 4.5,6.62 v4.5,7.54 | U2.3 3.44,23.23 v3.68,22.99 | R1.1 3.68,28.46 3.68,26.41 C1.2
  Top 0.254: C4.2 U3.4 9.66,20.33 v10.03,20.7 | C1.2 3.18,25.27 v3.68,24.77 | R8.7 R8.6
  Top 0.61: FB2.2 v48.77,8.31
  other vias: 22.1,12.45 17.02,17.53 22.1,22.61 27.18,17.53 18.29,13.72 18.29,21.34 25.91,21.34 25.91,13.72 35.74,18.67 5.87,16.31
  pour DigitalGND (rank 2): -0.5,35.5 55.5,35.5 55.5,-0.5 -0.5,-0.5
  pour Top (rank 3): 17.53,18.92 17.53,22.1 20.7,22.1 21.34,22.73 21.34,23.37 22.86,23.37 22.86,22.73 23.5,22.1 26.67,22.1 26.67,18.92 27.3,18.29 27.94,18.29 27.94,16.76 27.3,16.76 26.67,16.13 26.67,12.95 23.5,12.95 22.86,12.32 22.86,11.68 21.34,11.68 21.34,12.32 20.7,12.95 17.53,12.95 17.53,16.13 16.89,16.76 16.26,16.76 16.26,18.29 16.89,18.29
  pour Top: 34.37,16.92 34.82,16.92 34.82,17.68 36.42,17.68 36.42,20.19 37.19,20.95 37.19,22.71 36.5,23.39 35.74,23.39 35.28,22.94 34.29,22.94 34.21,22.86 34.21,17.07
  pour Top: 3.05,16.38 3.05,15.93 3.28,15.7 4.95,15.7 5.18,15.47 5.18,14.63 5.56,14.25 11.28,14.25 11.43,14.4 11.43,15.47 11.05,15.85 7.85,15.85 7.54,16.15 7.54,16.84 7.32,17.07 5.64,17.07 4.95,16.38
GPIO20
  Top 0.152: U1.B4 27.2,8.66 27.2,7.64 P1.20
GPIO23  (via drill 0.38)
  Top 0.152: U1.P5 26.06,24.03 26.06,22.86 25.65,22.45 23.65,22.45 23.22,22.89 23.22,23.5 22.99,23.72 21.21,23.72 20.98,23.5 20.98,22.81 20.62,22.45 18.57,22.45 v18.29,22.73
  Bottom 0.152: P2.3 9.47,28.93 10.82,27.58 15.39,27.58 17.65,25.32 17.65,23.37 v18.29,22.73
GPIO26  (via drill 0.38)
  Top 0.152: U1.R5 27.03,26.26 31.98,26.26 32.31,26.59 v32.77,26.59 | v47.85,27.36 47.47,27.36 46.18,26.06 46.18,21.87 45.49,21.18 45.49,8.76 45.11,8.38 45.11,7.51 P1.34
  VDD 0.152: v32.77,26.59 34.21,25.15 35.81,25.15 37.64,26.98 38.94,26.98 39.7,27.74 47.47,27.74 v47.85,27.36
GPIO27
  Top 0.152: U1.T5 26.89,27.05 P2.19
GPIO44
  Top 0.152: P2.24 32.61,30.23 32.61,27.36 31.83,26.57 25.3,26.57 24.77,26.04 24.77,25.02 U1.P6
GPIO45  (via drill 0.38)
  Top 0.152: U1.R6 v25.91,25.15
  Bottom 0.152: v25.91,25.15 28.57,27.81 34.37,27.81 35.13,28.57 35.13,29.57 35.81,30.25 45.23,30.25 P2.33
GPIO46
  Top 0.152: U1.T6 25.76,27.53 26.85,27.53 27.66,28.35 27.66,29.41 28.47,30.23 30.07,30.23 P2.22
GPIO47
  Top 0.152: U1.P7 23.52,24.99 23.52,27.25 24.77,28.5 24.77,30 P2.18
GPIO52
  Top 0.152: U1.R13 15.9,26.26 15.9,27.46 14.94,28.42 14.94,30.34 P2.10
GPIO57
  Top 0.152: U1.T15 12.42,28.47 12.42,30.04 P2.6
GPIO58
  Top 0.152: P2.4 9.67,30.25 11.28,30.25 12.12,29.41 12.12,28.27 13.21,27.18 13.21,26.42 U1.R15
GPIO59
  Top 0.152: U1.T16 11.35,27.05 9.75,28.65 9.75,29.49 9.14,30.1 7.28,30.1 P2.2
GPIO60
  Top 0.152: U1.N14 15.6,23.72 15.6,27.3 14.63,28.27 14.63,30.37 P2.8
GPIO64
  Top 0.152: U1.R7 24.49,26.26 24.49,27 25.32,27.84 26.62,27.84 27.36,28.57 27.36,30.06 P2.20
GPIO65
  Top 0.152: P2.17 25.57,28.27 25.22,28.27 U1.T7
GPIO89  (via drill 0.38)
  Top 0.152: U1.E1 32,13.46 v32,13.72
  VDD 0.152: v32,13.72 25.65,20.07 25.65,20.45 25.02,21.08 24.26,21.08 23.62,20.45 23.62,17.53 19.05,12.95 17.78,12.95 16.38,14.35 15.11,14.35 14.73,14.73 v14.73,16.26
  Bottom 0.152: v14.73,16.26 14.73,15.75 9.14,10.16 9.14,9.4 8.45,8.7 P1.4
I2C1.SCL  (via drill 0.38)
  Top 0.152: v17.02,11.18 17.7,11.18 18.14,10.74 18.14,10.06 U1.B11
  Bottom 0.152: P2.9 17.19,27.81 19.25,27.81 22.78,24.28 22.78,17.3 17.02,11.53 v17.02,11.18
I2C1.SDA  (via drill 0.38)
  Top 0.152: U1.A11 19.56,8.64 19.56,9.53 19.18,9.91 18.82,9.91 18.44,10.29 18.44,11.28 v18.29,11.43
  Bottom 0.152: P2.11 23.09,24.45 23.09,17.14 18.29,12.34 v18.29,11.43
I2C2.SCL  (via drill 0.38)
  Top 0.152: U1.A10 21.03,7.16 21.57,7.16 22.17,6.55 22.17,5.64 22.02,5.49 22.02,4.9 v22.61,4.32
  Bottom 0.152: v22.61,4.32 22.86,4.57 37.43,4.57 P1.28
I2C2.SDA  (via drill 0.38)
  Top 0.152: U1.B10 20.83,8.64 20.83,7.9 21.26,7.47 21.72,7.47 22.61,6.58 v22.61,5.26
  Bottom 0.152: P1.26 35.2,4.88 22.99,4.88 v22.61,5.26
JTAG_EMU0  (via drill 0.38)
  Top 0.152: U1.E2 30.84,12.6 32.28,12.6 33.53,11.35 34.59,11.35 v35.2,10.74
  VDD 0.152: v35.2,10.74 35.51,10.44 37.03,10.44 38.18,9.3 39.78,9.3 49.1,18.62 v49.5,18.62
  Bottom 0.152: EMU0.TP v49.5,18.62
JTAG_EMU1  (via drill 0.38)
  Top 0.152: v34.37,10.74 33.68,10.74 32.13,12.29 30.45,12.29 29.67,13.08 U1.E3
  VDD 0.152: v34.37,10.74 34.98,10.13 36.88,10.13 38.02,8.99 39.93,8.99 49,18.06 49.76,18.06 51,19.3 v51,19.75
  Bottom 0.152: EMU1.TP v51,19.75
JTAG_TCK  (via drill 0.38)
  Top 0.152: U1.D1 32.16,11.81 33.83,10.13 36.04,10.13 v36.73,9.45
  VDD 0.152: v36.73,9.45 37.49,8.69 40.08,8.69 48.89,17.5 v51,17.5
  Bottom 0.152: TCK.TP v51,17.5
JTAG_TDI  (via drill 0.38)
  Top 0.152: U1.C1 32.05,10.54 33.38,9.22 34.44,9.22 v35.05,8.61
  VDD 0.152: v35.05,8.61 35.89,7.77 40.54,7.77 46.89,14.12 v49.5,14.12
  Bottom 0.152: TDI.TP v49.5,14.12
JTAG_TDO  (via drill 0.38)
  Top 0.152: U1.C2 30.84,10.06 32.08,10.06 33.53,8.61 v34.21,8.61
  VDD 0.152: v34.21,8.61 35.36,7.47 40.69,7.47 46.63,13.41 50.59,13.41 v51,13
  Bottom 0.152: TDO.TP v51,13
JTAG_TMS  (via drill 0.38)
  Top 0.152: U1.D2 30.84,11.33 32.18,11.33 33.68,9.83 35.51,9.83 v35.89,9.45
  VDD 0.152: v35.89,9.45 36.96,8.38 40.23,8.38 48.23,16.38 v49.5,16.38
  Bottom 0.152: TMS.TP v49.5,16.38
JTAG_TRST#  (via drill 0.38)
  Top 0.152: U1.D3 29.87,11.02 32.03,11.02 33.53,9.53 34.98,9.53 v35.89,8.61 36.2,8.31 40.57,8.31 R12.2
  VDD 0.152: v35.89,8.61 36.42,8.08 40.39,8.08 47.56,15.25 v51,15.25
  Bottom 0.152: TRST.TP v51,15.25
N$1
  Top 0.152: R4.3 2.8,7.67 4.28,9.16 USR2.K
N$2
  Top 0.152: R4.4 2.25,7.58 2.67,8 USR3.K
N$4
  Top 0.152: R1.2 4.18,28.33 4.43,28.08 PWR.K
N$5
  Top 0.152: R4.2 3.3,7.72 4.04,8.46 6.54,8.46 USR1.K
N$6
  Top 0.152: R4.1 3.85,7.81 4.19,8.15 7.59,8.15 8.6,9.16 USR0.K
N$7  (via drill 0.38)
  Top 0.152: U1.F4 27.81,13.79 28.45,13.16 v28.45,12.7
  Bottom 0.152: v28.45,12.7 28.07,13.08 TP1.TP
N$9  (via drill 0.38)
  Top 0.152: U1.G4 v28.45,14.99
  Bottom 0.152: v28.45,14.99 25.65,14.99 24.64,13.97 TP2.TP
N$10  (via drill 0.38)
  Top 0.152: U1.F13 v15.75,13.72
  Bottom 0.152: v15.75,13.72 15.24,13.72 TP3.TP
N$11  (via drill 0.38)
  Top 0.152: U1.G13 v15.75,14.99
  Bottom 0.152: v15.75,14.99 16.89,13.84 TP4.TP
N$12
  Top 0.152: U1.D6 U1.D7
N$22  (via drill 0.38)
  Top 0.152: U1.M16 v13.21,22.61 | R3.2 8.66,16.64 9.07,16.23 v9.45,16.23
  VDD 0.152: v13.21,22.61 11.73,21.13 11.73,16.23 11.28,15.77 10.74,15.77 10.29,16.23 v9.45,16.23
N$24
  Top 0.152: U1.N5 U1.N4
N$25
  Top 0.152: U1.M4 U1.L4
N$26
  Top 0.152: U1.E4 U1.D4
N$27
  Top 0.152: U1.N11 U1.N10
N$31
  Top 0.152: U1.D11 U1.C11
N$32
  Top 0.152: U1.D10 U1.C10
OSC.GND  (via drill 0.38)
  Top 0.152: U1.N15 13.21,23.88 v11.94,23.88 | v11.94,22.61 11.56,22.23 C3.1 | v11.94,25.15 11.56,25.53 C2.1
  DigitalGND 0.152: v11.94,25.15 v11.94,23.88 v11.94,22.61
OSC.IN
  Top 0.152: U1.P16 11.18,24.51 11.04,24.38 R2.2 10.41,25.03 C2.2 9.62,25.83 Y1.2
OSC.OUT
  Top 0.152: U1.N16 11.18,23.24 11.04,23.38 R2.1 10.41,22.73 C3.2 9.62,21.93 Y1.1
PMIC_PGOOD  (via drill 0.38)
  Top 0.152: U1.P11 U1.N12 v17.02,23.88 | v3.68,23.88 U2.2
  Bottom 0.152: v17.02,23.88 15.98,23.88 15.09,24.77 15.09,26.59 14.71,26.98 14.17,26.98 13.56,26.36 11.35,26.36 8.87,23.88 v3.68,23.88
PRU0.1  (via drill 0.38)
  Top 0.152: U1.A2 30.86,7.49 v30.99,7.49
  VDD 0.152: v30.99,7.49 31.45,7.49 32.31,6.63 32.31,5.33 32.54,5.11 44.98,5.11 P1.33
PRU0.2
  Top 0.152: U1.B2 30.84,8.79 31.98,8.79 33.38,7.39 43.2,7.39 44.88,9.07 44.88,21.49 45.57,22.17 45.57,26.36 47.62,28.42 47.62,29.41 46.71,30.33 45.15,30.33 P2.32
PRU0.3
  Top 0.152: U1.B1 31.95,9.27 33.53,7.7 43.05,7.7 44.58,9.22 44.58,21.64 45.26,22.33 45.26,28.12 45.41,28.27 45.41,29.57 44.65,30.33 42.61,30.33 P2.30
PRU0.4  (via drill 0.38)
  Top 0.152: U1.A3 29.59,7.49 v29.72,7.49
  VDD 0.152: v29.72,7.49 29.72,5.71 30.33,5.11 32.08,5.11 32.38,4.8 42.74,4.8 P1.31
PRU0.5
  Top 0.152: U1.B3 29.67,9.27 30.45,8.48 31.83,8.48 33.22,7.09 43.36,7.09 45.19,8.91 45.19,21.34 45.87,22.02 45.87,26.21 47.93,28.27 47.93,30.09 P2.34
PRU0.6
  Top 0.152: U1.C3 29.87,9.75 31.93,9.75 33.68,8 42.9,8 44.27,9.37 44.27,21.79 44.96,22.48 44.96,28.27 45.11,28.42 45.11,29.41 44.5,30.02 40.38,30.02 P2.28
PRU0.7  (via drill 0.38)
  Top 0.152: U1.C4 28.3,10.06 28.3,8.53 v28.45,8.38
  VDD 0.152: v28.45,8.38 27.81,7.75 27.81,5.64 28.35,5.11 29.72,5.11 30.02,4.8 31.93,4.8 32.23,4.5 40.5,4.5 P1.29
PRU1.10  (via drill 0.38)
  Top 0.152: U1.F1 v30.99,13.72
  VDD 0.152: v30.99,13.72 30.99,10.85 34.67,7.16 44.42,7.16 45.26,6.33 45.26,5.26 45.72,4.8 47.82,4.8 P1.35
PWM0A
  Top 0.152: U1.A1 32.51,7.11 32.51,5.71 33.4,4.83 47.85,4.83 P1.36
PWM1A  (via drill 0.38)
  Top 0.152: v17.02,25.15 U1.P12
  Bottom 0.152: v17.02,25.15 14.88,27.28 14.02,27.28 13.41,26.67 11.2,26.67 10.59,26.06 8.78,26.06 P2.1
PWR.BTN  (via drill 0.38)
  Top 0.152: U1.T11 19.74,27.86 19.74,30.34 P2.12 | POWER.4 POWER.3 6.25,12.61 v6.1,12.45
  Bottom 0.152: P2.12 17.47,30.33 5.03,30.33 3.12,28.42 3.12,22.71 3.43,22.4 5.71,22.4 7.24,20.88 7.24,13.59 v6.1,12.45
RESET#  (via drill 0.38)
  Top 0.152: v18.29,24.99 18.29,25.15 U1.R11 | v11.18,21.21 11.05,21.34 9.83,21.34 9.07,20.57 5.97,20.57 5.59,20.95 5.59,21.84 4.78,22.65 U2.4
  Bottom 0.152: v11.18,21.21 11.94,21.97 16.38,21.97 17.65,20.7 18.57,20.7 18.97,21.11 18.97,24.31 v18.29,24.99 18.29,25.15 15.01,28.42 15.01,29.41 15.62,30.02 34.94,30.02 P2.26
SPI0.CLK
  Top 0.152: P1.8 14.95,7.49 15.88,7.49 U1.A13
SPI0.CS
  Top 0.152: U1.A14 14.73,8 14.1,7.37 12.29,7.37 P1.6
SPI0.MISO
  Top 0.152: U1.B13 17.17,8.48 17.17,7.17 P1.10
SPI0.MOSI
  Top 0.152: U1.B14 15.75,8.64 16.51,8.64 16.87,8.28 16.87,7.72 16.31,7.16 15.62,7.16 15.01,6.55 15.01,5.64 15.62,5.03 17.57,5.03 P1.12
SPI1.CLK  (via drill 0.38)
  Top 0.152: v29.46,8.64 29.01,8.64 28.6,9.04 28.6,10.64 28.22,11.02 27.03,11.02 U1.C5 | P2.29 42.51,27.89 44.04,27.89 44.35,27.58 44.35,22.78 42.75,21.18 41.99,21.18 41.15,20.34 v41.15,19.89
  Bottom 0.152: v29.46,8.64 30.96,8.64 34.75,12.42 34.75,18.97 35.36,19.58 40.84,19.58 v41.15,19.89
SPI1.CS  (via drill 0.38)
  Top 0.152: U1.A4 28.32,7.49 v28.45,7.49 | v41.15,18.97 41.76,19.58 41.76,20.5 42.14,20.88 42.9,20.88 44.65,22.63 44.65,28.29 P2.31
  Bottom 0.152: v28.45,7.49 29.03,8.08 30.86,8.08 35.05,12.27 35.05,18.82 35.51,19.28 40.84,19.28 v41.15,18.97
SPI1.MISO  (via drill 0.38)
  Top 0.152: U1.C12 v17.02,9.91
  Bottom 0.152: v17.02,9.91 18.36,9.91 24.23,15.77 30.25,15.77 31.39,16.92 31.39,20.65 34.37,23.62 34.37,25.45 37.84,28.93 P2.27
SPI1.MOSI  (via drill 0.38)
  Top 0.152: U1.C13 15.75,11.18 v15.75,12.45
  Bottom 0.152: v15.75,12.45 15.75,11.56 16.76,10.54 18.54,10.54 24.08,16.08 30.1,16.08 31.09,17.07 31.09,20.8 34.06,23.77 34.06,25.6 36.39,27.93 P2.25
UART0.RX  (via drill 0.38)
  Top 0.152: U1.A12 18.57,7.09 19.05,7.09 19.66,6.48 19.66,4.8 v19.43,4.57
  Bottom 0.152: P1.32 42.51,4.57 41,4.57 40.23,3.81 40.23,3.28 39.17,2.21 20.57,2.21 19.74,3.05 19.74,4.27 v19.43,4.57
UART0.TX  (via drill 0.38)
  Top 0.152: U1.B12 18.29,8.64 18.29,7.85 18.75,7.39 19.2,7.39 19.96,6.63 19.96,4.93 v20.32,4.57
  Bottom 0.152: P1.30 39.97,4.57 38.33,4.57 37.72,3.96 37.72,3.2 37.03,2.52 20.73,2.52 20.04,3.2 20.04,4.29 v20.32,4.57
UART4.RX  (via drill 0.38)
  Top 0.152: U1.P15 13.18,25.17 13.18,25.93 12.57,26.54 11.4,26.54 10.67,27.28 9.75,27.28 v9.65,27.18
  VDD 0.152: P2.5 9.65,27.59 v9.65,27.18
UART4.TX  (via drill 0.38)
  Top 0.152: U1.R16 12.14,26.21 11.28,26.21 10.82,26.67 v10.41,26.67
  VDD 0.152: P2.7 12.85,28.93 10.59,26.67 v10.41,26.67
USB1.D+  (via drill 0.38)
  Top 0.152: U1.L15 v14.48,20.07
  VDD 0.152: P1.11 17.49,4.65 17.49,6.67 15.39,8.76 15.39,11.58 13.99,12.98 13.99,19.58 v14.48,20.07
USB1.D-  (via drill 0.38)
  Top 0.152: U1.L16 v13.21,20.07
  VDD 0.152: P1.9 17.18,4.64 17.18,6.51 15.09,8.61 15.09,11.43 13.69,12.83 13.69,19.58 v13.21,20.07
USB1.DRVVBUS  (via drill 0.38)
  Top 0.152: U1.M14 v14.48,21.34
  VDD 0.152: v14.48,21.34 13.26,21.34 12.34,20.42 12.34,12.95 13.87,11.43 13.87,7.62 14.78,6.71 14.78,2.97 14.1,2.29 9.69,2.29 P1.3
USB1.ID  (via drill 0.38)
  Top 0.152: U1.L14 v15.75,20.07
  Bottom 0.152: P1.13 21.15,4.61 20.57,5.18 19.2,5.18 18.82,4.8 15.54,4.8 14.78,5.56 14.78,6.55 13.26,8.08 11.66,8.08 11.35,8.38 11.35,11.43 16.26,16.33 16.26,19.56 v15.75,20.07
USB1.VBUS  (via drill 0.38)
  Top 0.152: U1.M15 14.5,22.63 v14.55,22.63
  VDD 0.152: v14.55,22.63 14.1,22.63 12.04,20.57 12.04,12.8 12.57,12.27 12.57,8.46 14.48,6.55 14.48,3.12 13.95,2.59 11.93,2.59 P1.5
VBUS.RAW
  pour Top: 4.06,18.92 4.95,18.92 5.08,19.05 5.08,19.68 5.21,19.81 6.1,19.81 6.1,18.54 5.97,18.41 5.08,18.41 4.83,18.67 4.06,18.67
VDD_1V8
  pour Top: 20.07,20.7 20.07,18.92 19.3,18.16 18.92,18.16 18.92,16.89 19.3,16.89 20.07,16.13 20.07,14.35 20.32,14.35 20.32,20.7
VDD_3V3A
  pour Top: 21.34,20.83 22.86,20.83 22.86,18.92 23.5,18.29 24.13,18.29 24.13,16.76 23.5,16.76 22.86,16.13 22.86,14.22 21.34,14.22
VDD_3V3AUX  (via drill 0.38)
  Top 0.152: PWR.A 2.29,26.79 v2.29,25.91
  VDD 0.152: v19.43,14.99 20.32,15.88 20.32,22.23 22.1,24 22.1,25.78 20.07,27.81 20.07,29.72 19.3,30.48 18.29,30.48 17.53,31.24 17.53,31.95 16.64,32.84 5.38,32.84 3.43,30.89 3.43,27.05 v2.29,25.91
  pour Top (rank 2): 18.8,15.75 19.43,15.75 19.68,15.49 19.68,14.48 19.43,14.22 18.8,14.22
VDD_RTC  (via drill 0.38)
  Top 0.254: v5.03,25.53 4.65,25.91 C1.1 4.18,25.48 4.78,24.88 U2.5 4.51,24.53
  VDD 0.254: v19.43,20.07 19.43,22.48 21.72,24.77 21.72,25.53 19.68,27.56 19.68,29.46 19.05,30.1 18.03,30.1 17.14,30.99 17.14,31.83 16.51,32.46 5.51,32.46 3.81,30.76 3.81,26.8 5.03,25.58 v5.03,25.53
  pour Top (rank 2): 18.8,20.83 19.43,20.83 19.68,20.57 19.68,19.56 19.43,19.3 18.8,19.3
VIN  (via drill 0.51)
  VDD 0.813: v19.66,26.44 18.8,27.3 18.01,27.3 17.35,27.96 17.35,29.62 16.76,30.2 5.31,30.2 4.57,29.46 4.57,27.53 7.19,24.92 7.19,4.81 P1.1
  pour Top (rank 2): 20.32,27.18 19.68,27.18 19.43,26.92 19.43,24.64 19.68,24.38 20.32,24.38
VIN.USB  (via drill 0.51)
  Top 0.152: U1.J16 10.92,18.16 10.67,18.41 9.65,18.41 v9.53,18.29
  Top 0.254: FB1.2 8.26,19.56 C4.1 U3.6
  VDD 0.813: v20.95,25.15 19.43,25.15 18.52,26.06 16.23,26.06 14.94,27.36 12.57,27.36 8.69,23.47 8.69,20.27 9.53,19.43 v9.53,18.29 9.53,17.75 8.38,16.61 8.38,15.32 10.06,13.64 10.06,8.91 12.27,6.71 12.27,4.79 P1.7
  pour Top: 6.73,19.68 6.73,18.54 6.86,18.41 8.89,18.41 9.27,18.03 9.65,18.03 10.03,18.41 9.78,18.67 9.78,19.05 8.89,19.05 8.89,19.43 8.51,19.43 8.13,19.68
  pour Top: 21.59,27.18 20.95,27.18 20.7,26.92 20.7,24.64 20.95,24.38 21.59,24.38
VOUT  (via drill 0.51)
  VDD 1.016: P1.24 33.85,6.66 30.48,10.03 28.7,10.03 27.18,11.56 27.18,15.24 24.64,17.78 v24.64,20.07
  Bottom 1.016: P2.13 24.64,25.44 v24.64,20.07
  pour Top: 24,20.7 25.27,20.7 25.27,19.43 24,19.43

## Text on the board
Top: PocketBeagle | PocketBeagle | PocketBeagle
tPlace: 2 | P2 | PocketBeagle Rev A2a | 36 | 35 | 1 | OSD3358 | 2 | 36 | 35 | 1 | P1 | beagleboard.org/pocket
bPlace: BAT | PRU0 | 58 | 57 | 60 | 52 | PB | + | T | 47 | 64 | 46 | 44 | RST | 6 | 3 | 2 | 5 | A7(1.8) | 59 | PWM1A | 23 | RX | TX | SCL | SDA | VOUT | GND | 65 | 27 | GND | +3.3V | MOSI | MISO | CLK | CS1 | 45 | A5/86 | U4 | I2C1 | SPI1 | P2 | SPI0 | I2C2 | U0 | P1 | A6/87 | 89 | CS0 | CLK | MISO | MOSI | +3.3V | GND | A+ | 20 | GND | VOUT | SDA | SCL | TX | RX | 26 | PWM0A | VIN | P1.10 | EN | VB | VI | - | + | ID | GND | - | 0 | 1 | 2 | 3 | 4 | 7 | 4 | 1 | USB1 | AIN (1.8V) | PRU0
tNames: microUSB | PocketBeagle
Reference: 75 Mils back--> / Try to move back 75 Mils <---